# Altium PCB dipext-sock_r2.PcbDoc
Units mil, origin at the board's own origin, x right, y up, seen from the top; angles counter-clockwise.
Board outline 3500 x 3500 mil, 2 copper layers (Top Layer, Bottom Layer); 46 components, 80 nets, 164 pads, 0 vias.
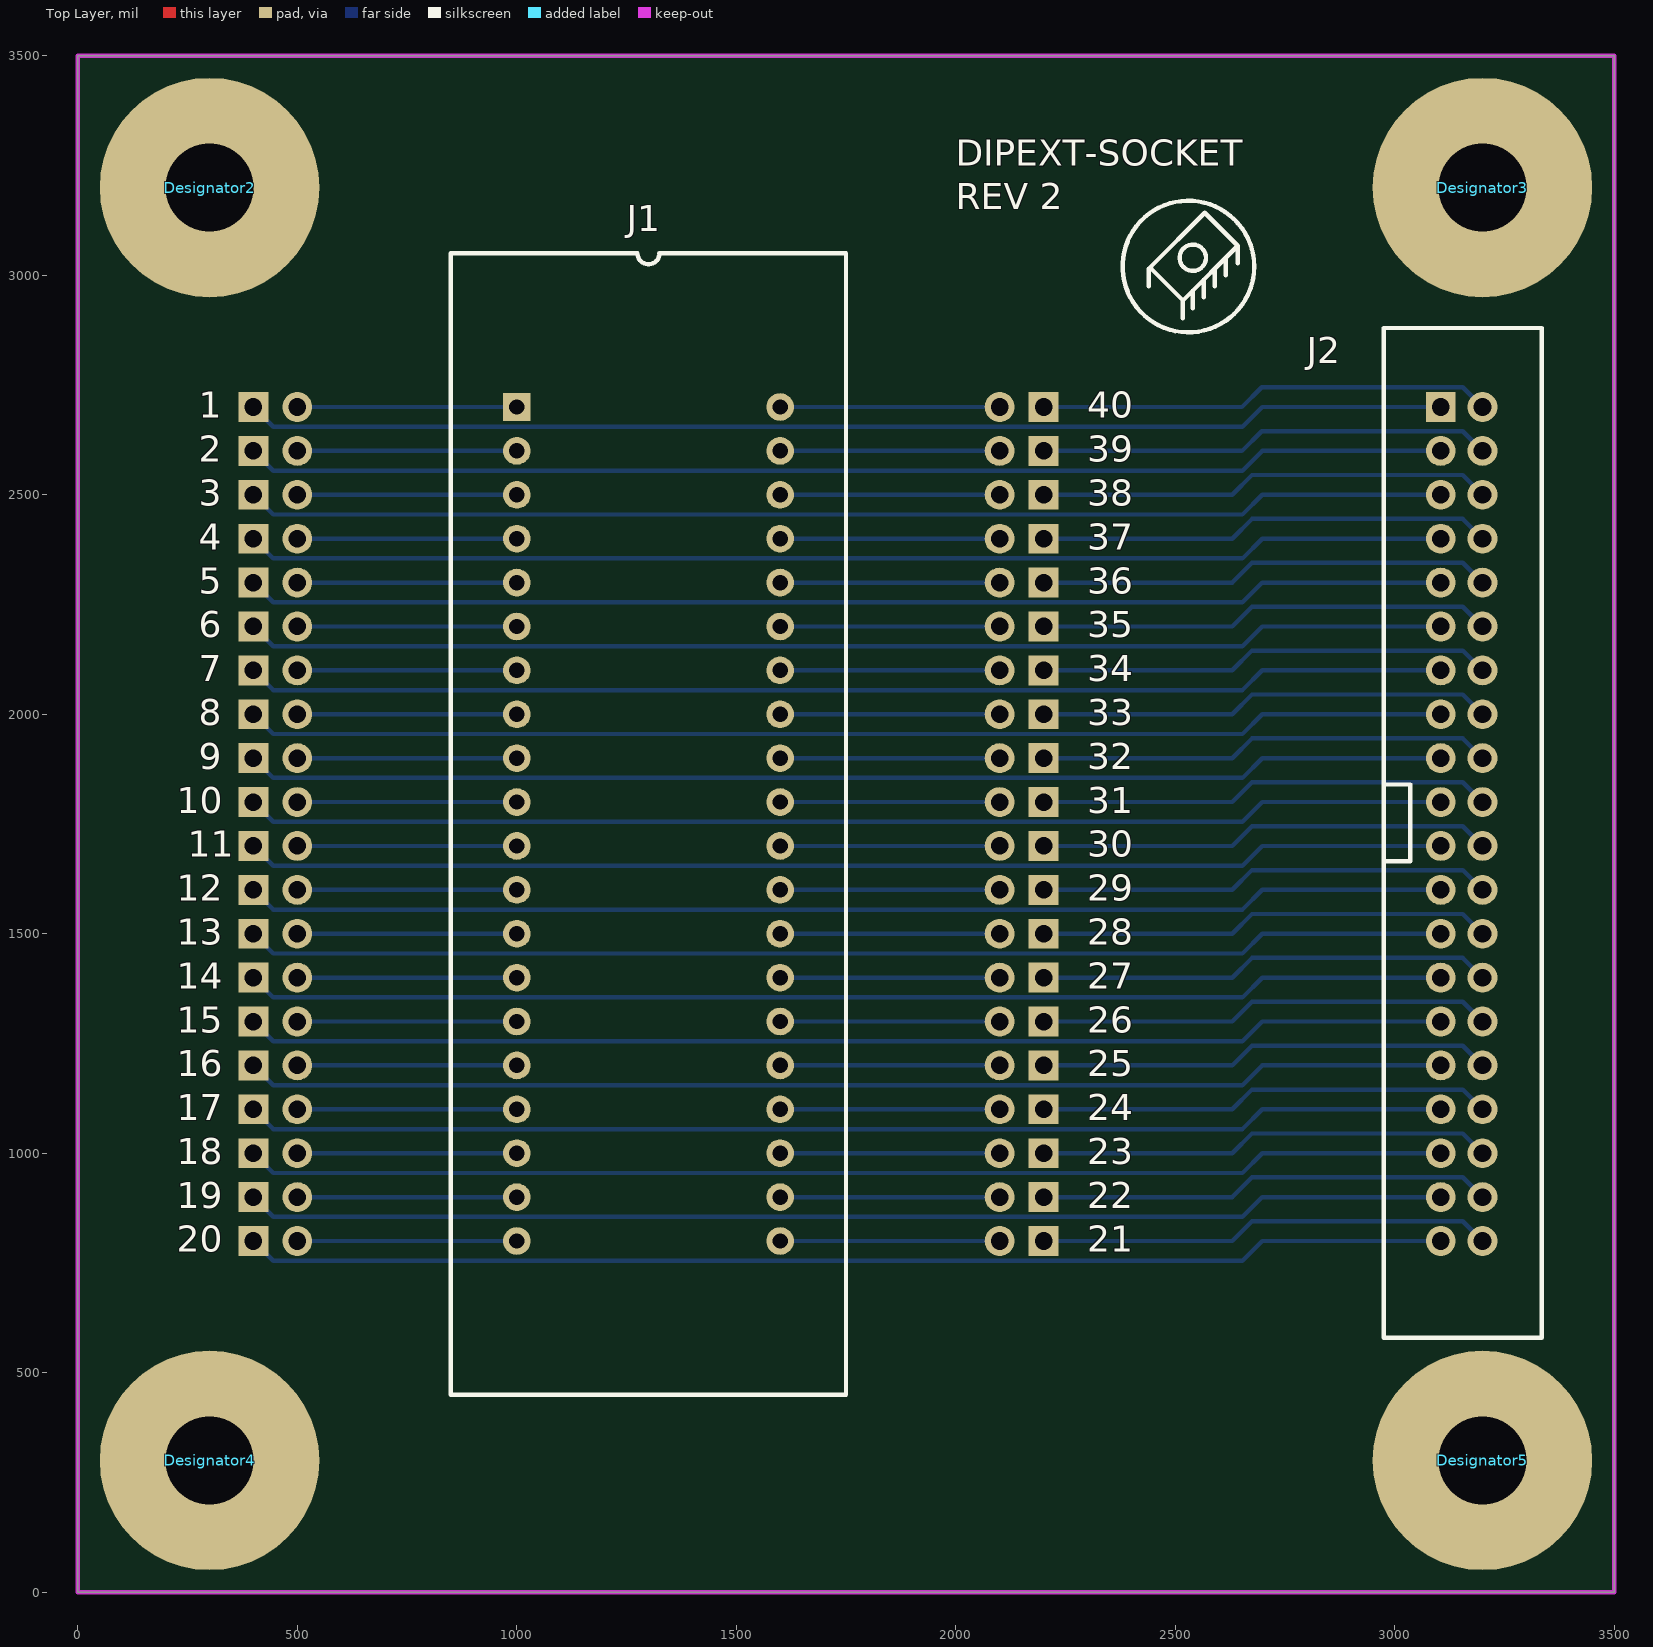
[diagram p0: Top Layer view]
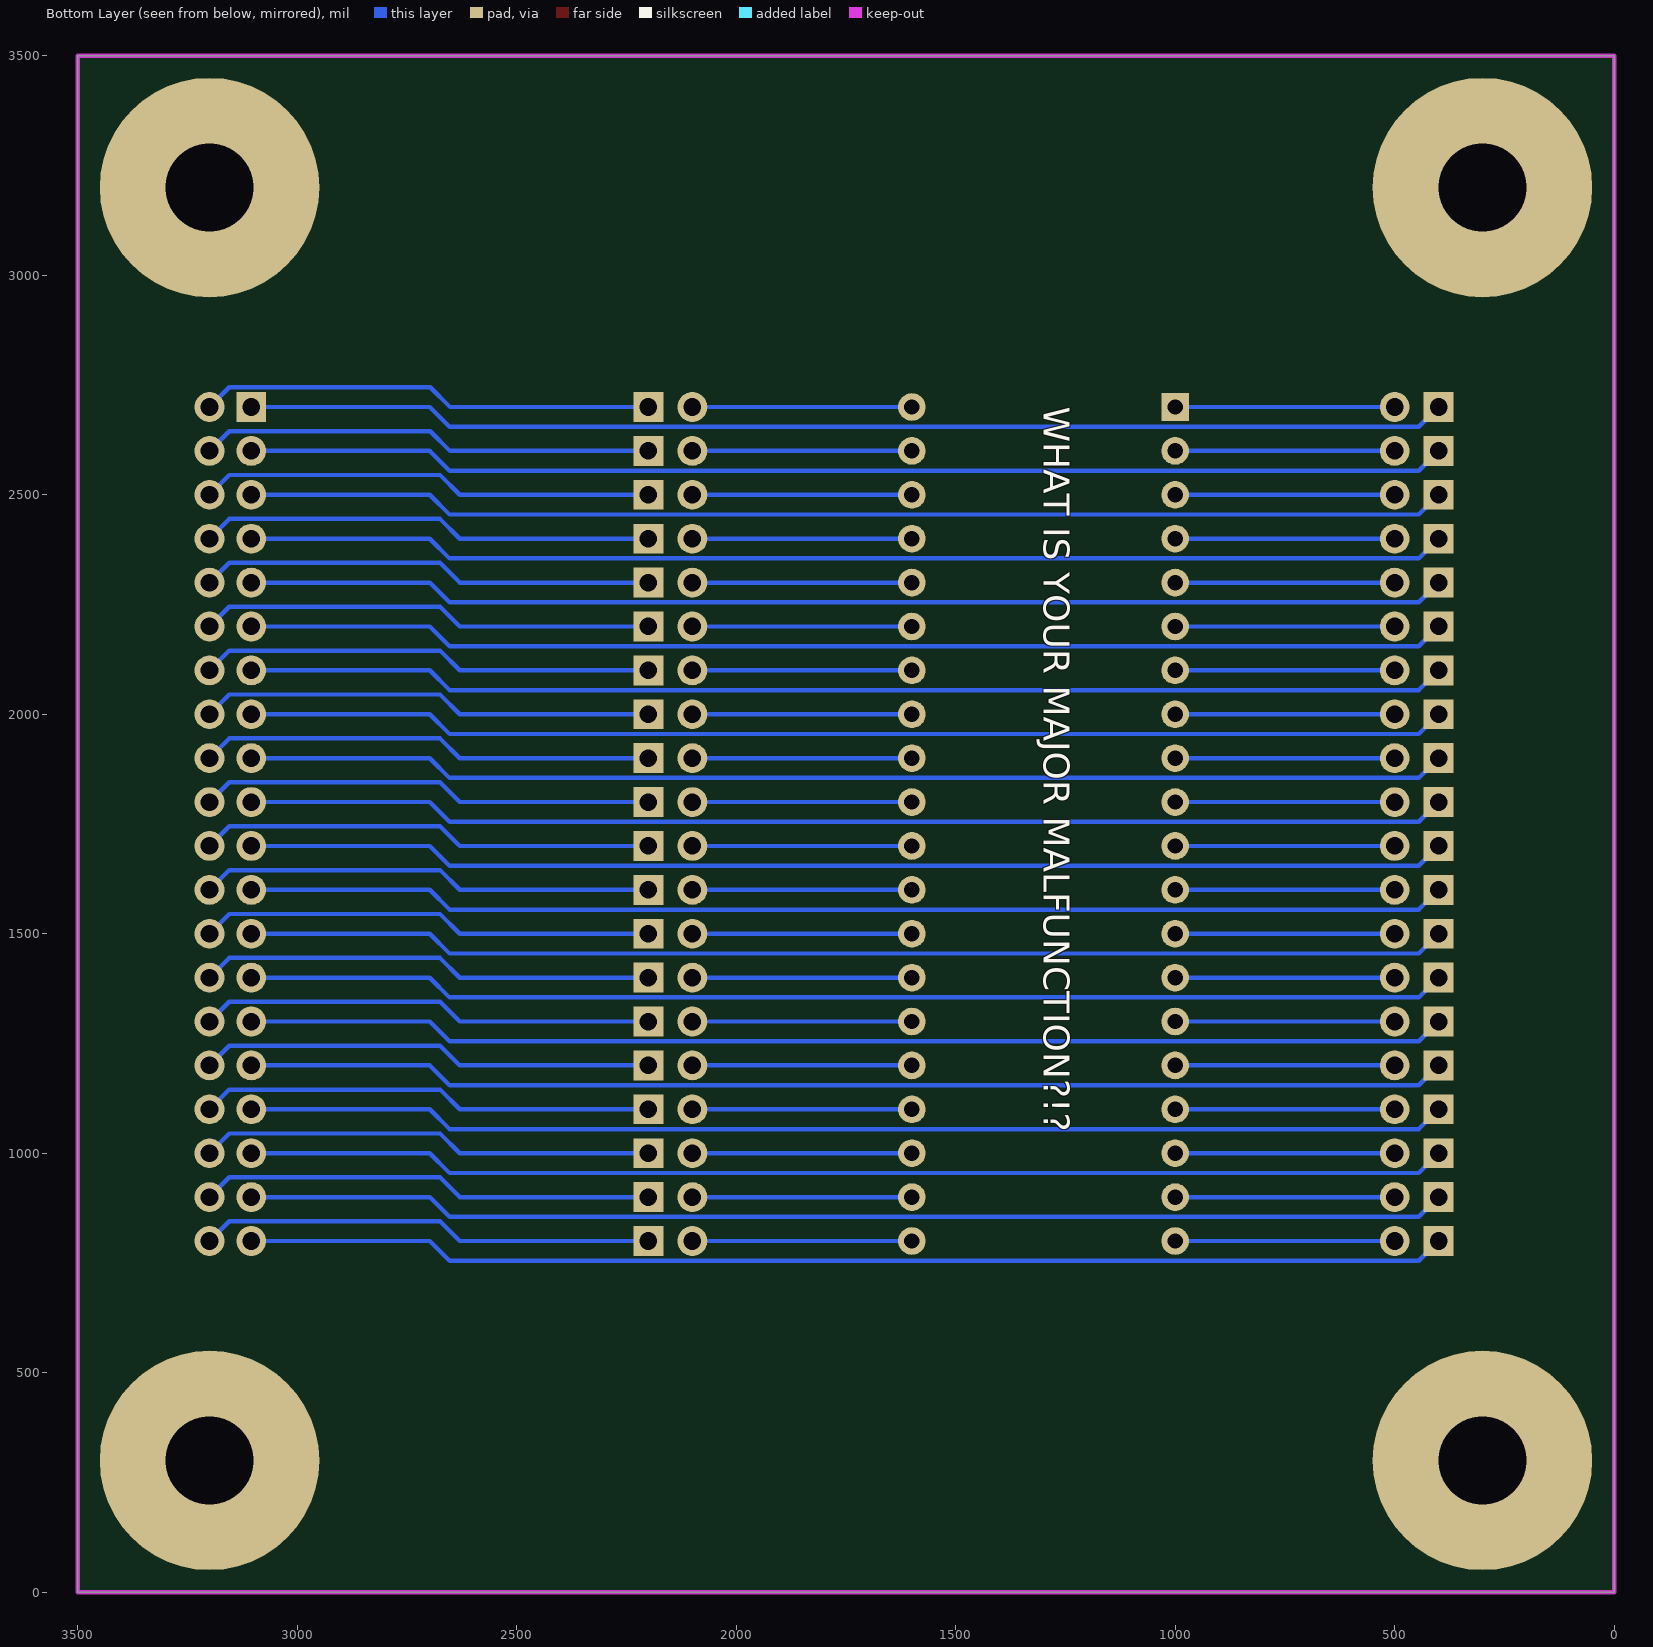
[diagram p1: Bottom Layer view, seen from below]

## Layer stack, top to bottom
Top Solder: solder mask 0.4, Solder Resist, Dk 3.5
Top Layer: signal copper 1.4
Dielectric 1: dielectric 12.6, FR-4, Dk 4.8
Bottom Layer: signal copper 1.4
Bottom Solder: solder mask 0.4, Solder Resist, Dk 3.5

## Board outline
0,0 3500,0 3500,3500 0,3500

## Design rules (kind name [scope] priority, off if disabled: settings)
Clearance [All] p1: gap=10
PolygonConnect [All] p1: connectstyle=Relief reliefconductorwidth=10 reliefentries=4 polygonreliefangle="90 Angle" airgapwidth=10
RoutingVias [All] p1: holewidth=28 width=50 viastyle="Through Hole" minholewidth=28 minwidth=50 maxholewidth=28 maxwidth=50
SolderMaskExpansion [All] p1: expansion=4
Width [All] p1: maxlimit=10 minlimit=10 preferedwidth=10
30 further rules are at their usual default settings.

## Classes and differential pairs
component class top: J1 J2
component class CH1: J3_CH1
component class CH2: J3_CH2
component class CH3: J3_CH3
component class CH4: J3_CH4
component class CH5: J3_CH5
component class CH6: J3_CH6
component class CH7: J3_CH7
component class CH8: J3_CH8
component class CH9: J3_CH9
component class CH10: J3_CH10
component class CH11: J3_CH11
component class CH12: J3_CH12
component class CH13: J3_CH13
component class CH14: J3_CH14
component class CH15: J3_CH15
component class CH16: J3_CH16
component class CH17: J3_CH17
component class CH18: J3_CH18
component class CH19: J3_CH19
component class CH20: J3_CH20
component class CH21: J3_CH21
component class CH22: J3_CH22
component class CH23: J3_CH23
component class CH24: J3_CH24
component class CH25: J3_CH25
component class CH26: J3_CH26
component class CH27: J3_CH27
component class CH28: J3_CH28
component class CH29: J3_CH29
component class CH30: J3_CH30
component class CH31: J3_CH31
component class CH32: J3_CH32
component class CH33: J3_CH33
component class CH34: J3_CH34
component class CH35: J3_CH35
component class CH36: J3_CH36
component class CH37: J3_CH37
component class CH38: J3_CH38
component class CH39: J3_CH39
component class CH40: J3_CH40
net class I[1..40]: I1 I2 I3 I4 I5 I6 I7 I8 I9 I10 I11 I12 I13 I14 I15 I16 I17 I18 I19 I20 I21 I22 I23 I24 I25 I26 I27 I28 I29 I30 I31 I32 I33 I34 I35 I36 I37 I38 I39 I40
net class S[1..40]: S1 S2 S3 S4 S5 S6 S7 S8 S9 S10 S11 S12 S13 S14 S15 S16 S17 S18 S19 S20 S21 S22 S23 S24 S25 S26 S27 S28 S29 S30 S31 S32 S33 S34 S35 S36 S37 S38 S39 S40
channel class chan: CH1 CH2 CH3 CH4 CH5 CH6 CH7 CH8 CH9 CH10 CH11 CH12 CH13 CH14 CH15 CH16 CH17 CH18 CH19 CH20 CH21 CH22 CH23 CH24 CH25 CH26 CH27 CH28 CH29 CH30 CH31 CH32 CH33 CH34 CH35 CH36 CH37 CH38 CH39 CH40

## Components (designator, comment, footprint, x,y, rotation, side; value= is the part's Value field where it differs from the comment)
1 "XG4H-5031" SIL2 400,2700 r90 top (schematic designator J3)
2 "XG4H-5031" SIL2 400,2600 r90 top (schematic designator J3)
3 "XG4H-5031" SIL2 400,2500 r90 top (schematic designator J3)
4 "XG4H-5031" SIL2 400,2400 r90 top (schematic designator J3)
5 "XG4H-5031" SIL2 400,2300 r90 top (schematic designator J3)
6 "XG4H-5031" SIL2 400,2200 r90 top (schematic designator J3)
7 "XG4H-5031" SIL2 400,2100 r90 top (schematic designator J3)
8 "XG4H-5031" SIL2 400,2000 r90 top (schematic designator J3)
9 "XG4H-5031" SIL2 400,1900 r90 top (schematic designator J3)
10 "XG4H-5031" SIL2 400,1800 r90 top (schematic designator J3)
11 "XG4H-5031" SIL2 400,1700 r90 top (schematic designator J3)
12 "XG4H-5031" SIL2 400,1600 r90 top (schematic designator J3)
13 "XG4H-5031" SIL2 400,1500 r90 top (schematic designator J3)
14 "XG4H-5031" SIL2 400,1400 r90 top (schematic designator J3)
15 "XG4H-5031" SIL2 400,1300 r90 top (schematic designator J3)
16 "XG4H-5031" SIL2 400,1200 r90 top (schematic designator J3)
17 "XG4H-5031" SIL2 400,1100 r90 top (schematic designator J3)
18 "XG4H-5031" SIL2 400,1000 r90 top (schematic designator J3)
19 "XG4H-5031" SIL2 400,900 r90 top (schematic designator J3)
20 "XG4H-5031" SIL2 400,800 r90 top (schematic designator J3)
21 "XG4H-5031" SIL2 2200,800 r270 top (schematic designator J3)
22 "XG4H-5031" SIL2 2200,900 r270 top (schematic designator J3)
23 "XG4H-5031" SIL2 2200,1000 r270 top (schematic designator J3)
24 "XG4H-5031" SIL2 2200,1100 r270 top (schematic designator J3)
25 "XG4H-5031" SIL2 2200,1200 r270 top (schematic designator J3)
26 "XG4H-5031" SIL2 2200,1300 r270 top (schematic designator J3)
27 "XG4H-5031" SIL2 2200,1400 r270 top (schematic designator J3)
28 "XG4H-5031" SIL2 2200,1500 r270 top (schematic designator J3)
29 "XG4H-5031" SIL2 2200,1600 r270 top (schematic designator J3)
30 "XG4H-5031" SIL2 2200,1700 r270 top (schematic designator J3)
31 "XG4H-5031" SIL2 2200,1800 r270 top (schematic designator J3)
32 "XG4H-5031" SIL2 2200,1900 r270 top (schematic designator J3)
33 "XG4H-5031" SIL2 2200,2000 r270 top (schematic designator J3)
34 "XG4H-5031" SIL2 2200,2100 r270 top (schematic designator J3)
35 "XG4H-5031" SIL2 2200,2200 r270 top (schematic designator J3)
36 "XG4H-5031" SIL2 2200,2300 r270 top (schematic designator J3)
37 "XG4H-5031" SIL2 2200,2400 r270 top (schematic designator J3)
38 "XG4H-5031" SIL2 2200,2500 r270 top (schematic designator J3)
39 "XG4H-5031" SIL2 2200,2600 r270 top (schematic designator J3)
40 "XG4H-5031" SIL2 2200,2700 r270 top (schematic designator J3)
Designator2 "Comment" SAE10_LOOSE 300,3200 r0 top
Designator3 "Comment" SAE10_LOOSE 3200,3200 r0 top
Designator4 "Comment" SAE10_LOOSE 300,300 r0 top
Designator5 "Comment" SAE10_LOOSE 3200,300 r0 top
J1 "240-1288-00-0602J" 240-1300-00-0602J 1000,2700 r0 top
J2 "IDC40" IDC40 2975,2880 r0 top

## Footprints (in the part's own frame and the unit in brackets; to place one, negate y for a bottom-side part, rotate by r counter-clockwise, add the part's x,y. Pads: shape width x height; smd on the part's side, far side on the other; paste and mask are expansions set on the pad)
240-1300-00-0602J [mil]
  rect 63x63 hole 35: 1(0,0)
  round 63 hole 35: 2(0,-100) 3(0,-200) 4(0,-300) 5(0,-400) 6(0,-500) 7(0,-600) 8(0,-700) 9(0,-800) 10(0,-900) 11(0,-1000) 12(0,-1100) 13(0,-1200) 14(0,-1300) 15(0,-1400) 16(0,-1500) 17(0,-1600) 18(0,-1700) 19(0,-1800) 20(0,-1900) 21(600,-1900) 22(600,-1800) 23(600,-1700) 24(600,-1600) 25(600,-1500) 26(600,-1400) 27(600,-1300) 28(600,-1200) 29(600,-1100) 30(600,-1000) 31(600,-900) 32(600,-800) 33(600,-700) 34(600,-600) 35(600,-500) 36(600,-400) 37(600,-300) 38(600,-200) 39(600,-100) 40(600,0)
  silkscreen extent -150,-2250 750,350
IDC40 [mil]
  rect 68x68 hole 40: 1(130,-180)
  round 68 hole 40: 2(225,-180) 3(130,-280) 4(225,-280) 5(130,-380) 6(225,-380) 7(130,-480) 8(225,-480) 9(130,-580) 10(225,-580) 11(130,-680) 12(225,-680) 13(130,-780) 14(225,-780) 15(130,-880) 16(225,-880) 17(130,-980) 18(225,-980) 19(130,-1080) 20(225,-1080) 21(130,-1180) 22(225,-1180) 23(130,-1280) 24(225,-1280) 25(130,-1380) 26(225,-1380) 27(130,-1480) 28(225,-1480) 29(130,-1580) 30(225,-1580) 31(130,-1680) 32(225,-1680) 33(130,-1780) 34(225,-1780) 35(130,-1880) 36(225,-1880) 37(130,-1980) 38(225,-1980) 39(130,-2080) 40(225,-2080)
  silkscreen extent 0,-2300 360,0
SAE10_LOOSE [mil]
  round 500 hole 201: 1(0,0)
SIL2 [mil]
  rect 68x68 hole 40: 1(0,0)
  round 68 hole 40: 2(0,-100)

## Part data
1 2 3 4 5 6 7 8 9 10 11 12 13 14 15 16 17 18 19 20 21 22 23 24 25 26 27 28 29 30 31 32 33 34 35 36 37 38 39 40: "Fencepost 2x1 0.1\""
J1: "DIP40 ZIF"

## Nets (pads, with @x,y where several pads share a name; then routed paths per layer and width w, separated by ;. In a path a pad name is that pad's centre, name@x,y a point inside that pad or via, vN(x,y) a via of type N, cw(c..) or ccw(c..) an arc to the next point about the centre after c; other vN are vias at no path point)
I1: 1.1 J2.1 | length 2742.3
  Bottom Layer w10: 1.1 445,2655 2653,2655 2698,2700 J2.1
I2: 2.1 J2.3 | length 2742.3
  Bottom Layer w10: 2.1 445,2555 2653,2555 2698,2600 J2.3
I3: 3.1 J2.5 | length 2742.3
  Bottom Layer w10: 3.1 445,2455 2653,2455 2698,2500 J2.5
I4: 4.1 J2.7 | length 2742.3
  Bottom Layer w10: 4.1 445,2355 2653,2355 2698,2400 J2.7
I5: 5.1 J2.9 | length 2742.3
  Bottom Layer w10: 5.1 445,2255 2653,2255 2698,2300 J2.9
I6: 6.1 J2.11 | length 2742.3
  Bottom Layer w10: 6.1 445,2155 2653,2155 2698,2200 J2.11
I7: 7.1 J2.13 | length 2742.3
  Bottom Layer w10: 7.1 445,2055 2653,2055 2698,2100 J2.13
I8: 8.1 J2.15 | length 2742.3
  Bottom Layer w10: 8.1 445,1955 2653,1955 2698,2000 J2.15
I9: 9.1 J2.17 | length 2742.3
  Bottom Layer w10: 9.1 445,1855 2653,1855 2698,1900 J2.17
I10: 10.1 J2.19 | length 2742.3
  Bottom Layer w10: 10.1 445,1755 2653,1755 2698,1800 J2.19
I11: 11.1 J2.21 | length 2742.3
  Bottom Layer w10: 11.1 445,1655 2653,1655 2698,1700 J2.21
I12: 12.1 J2.23 | length 2742.3
  Bottom Layer w10: 12.1 445,1555 2653,1555 2698,1600 J2.23
I13: 13.1 J2.25 | length 2742.3
  Bottom Layer w10: 13.1 445,1455 2653,1455 2698,1500 J2.25
I14: 14.1 J2.27 | length 2742.3
  Bottom Layer w10: 14.1 445,1355 2653,1355 2698,1400 J2.27
I15: 15.1 J2.29 | length 2742.3
  Bottom Layer w10: 15.1 445,1255 2653,1255 2698,1300 J2.29
I16: 16.1 J2.31 | length 2742.3
  Bottom Layer w10: 16.1 445,1155 2653,1155 2698,1200 J2.31
I17: 17.1 J2.33 | length 2742.3
  Bottom Layer w10: 17.1 445,1055 2653,1055 2698,1100 J2.33
I18: 18.1 J2.35 | length 2742.3
  Bottom Layer w10: 18.1 445,955 2653,955 2698,1000 J2.35
I19: 19.1 J2.37 | length 2742.3
  Bottom Layer w10: 19.1 445,855 2653,855 2698,900 J2.37
I20: 20.1 J2.39 | length 2742.3
  Bottom Layer w10: 20.1 445,755 2653,755 2698,800 J2.39
I21: 21.1 J2.40 | length 1037.3
  Bottom Layer w10: 21.1 2630,800 2675,845 3155,845 J2.40
I22: 22.1 J2.38 | length 1037.3
  Bottom Layer w10: 22.1 2630,900 2675,945 3155,945 J2.38
I23: 23.1 J2.36 | length 1037.3
  Bottom Layer w10: 23.1 2630,1000 2675,1045 3155,1045 J2.36
I24: 24.1 J2.34 | length 1037.3
  Bottom Layer w10: 24.1 2630,1100 2675,1145 3155,1145 J2.34
I25: 25.1 J2.32 | length 1037.3
  Bottom Layer w10: 25.1 2630,1200 2675,1245 3155,1245 J2.32
I26: 26.1 J2.30 | length 1037.3
  Bottom Layer w10: 26.1 2630,1300 2675,1345 3155,1345 J2.30
I27: 27.1 J2.28 | length 1037.3
  Bottom Layer w10: 27.1 2630,1400 2675,1445 3155,1445 J2.28
I28: 28.1 J2.26 | length 1037.3
  Bottom Layer w10: 28.1 2630,1500 2675,1545 3155,1545 J2.26
I29: 29.1 J2.24 | length 1037.3
  Bottom Layer w10: 29.1 2630,1600 2675,1645 3155,1645 J2.24
I30: 30.1 J2.22 | length 1037.3
  Bottom Layer w10: 30.1 2630,1700 2675,1745 3155,1745 J2.22
I31: 31.1 J2.20 | length 1037.3
  Bottom Layer w10: 31.1 2630,1800 2675,1845 3155,1845 J2.20
I32: 32.1 J2.18 | length 1037.3
  Bottom Layer w10: 32.1 2630,1900 2675,1945 3155,1945 J2.18
I33: 33.1 J2.16 | length 1037.3
  Bottom Layer w10: 33.1 2630,2000 2675,2045 3155,2045 J2.16
I34: 34.1 J2.14 | length 1037.3
  Bottom Layer w10: 34.1 2630,2100 2675,2145 3155,2145 J2.14
I35: 35.1 J2.12 | length 1037.3
  Bottom Layer w10: 35.1 2630,2200 2675,2245 3155,2245 J2.12
I36: 36.1 J2.10 | length 1037.3
  Bottom Layer w10: 36.1 2630,2300 2675,2345 3155,2345 J2.10
I37: 37.1 J2.8 | length 1037.3
  Bottom Layer w10: 37.1 2630,2400 2675,2445 3155,2445 J2.8
I38: 38.1 J2.6 | length 1037.3
  Bottom Layer w10: 38.1 2630,2500 2675,2545 3155,2545 J2.6
I39: 39.1 J2.4 | length 1037.3
  Bottom Layer w10: 39.1 2652,2600 2697,2645 3155,2645 J2.4
I40: 40.1 J2.2 | length 1037.3
  Bottom Layer w10: 40.1 2652,2700 2697,2745 3155,2745 J2.2
S1: 1.2 J1.1 | length 500
  Bottom Layer w10: 1.2 J1.1
S2: 2.2 J1.2 | length 500
  Bottom Layer w10: 2.2 J1.2
S3: 3.2 J1.3 | length 500
  Bottom Layer w10: 3.2 J1.3
S4: 4.2 J1.4 | length 500
  Bottom Layer w10: 4.2 J1.4
S5: 5.2 J1.5 | length 500
  Bottom Layer w10: 5.2 J1.5
S6: 6.2 J1.6 | length 500
  Bottom Layer w10: 6.2 J1.6
S7: 7.2 J1.7 | length 500
  Bottom Layer w10: 7.2 J1.7
S8: 8.2 J1.8 | length 500
  Bottom Layer w10: 8.2 J1.8
S9: 9.2 J1.9 | length 500
  Bottom Layer w10: 9.2 J1.9
S10: 10.2 J1.10 | length 500
  Bottom Layer w10: 10.2 J1.10
S11: 11.2 J1.11 | length 500
  Bottom Layer w10: 11.2 J1.11
S12: 12.2 J1.12 | length 500
  Bottom Layer w10: 12.2 J1.12
S13: 13.2 J1.13 | length 500
  Bottom Layer w10: 13.2 J1.13
S14: 14.2 J1.14 | length 500
  Bottom Layer w10: 14.2 J1.14
S15: 15.2 J1.15 | length 500
  Bottom Layer w10: 15.2 J1.15
S16: 16.2 J1.16 | length 500
  Bottom Layer w10: 16.2 J1.16
S17: 17.2 J1.17 | length 500
  Bottom Layer w10: 17.2 J1.17
S18: 18.2 J1.18 | length 500
  Bottom Layer w10: 18.2 J1.18
S19: 19.2 J1.19 | length 500
  Bottom Layer w10: 19.2 J1.19
S20: 20.2 J1.20 | length 500
  Bottom Layer w10: 20.2 J1.20
S21: 21.2 J1.21 | length 500
  Bottom Layer w10: J1.21 21.2
S22: 22.2 J1.22 | length 500
  Bottom Layer w10: J1.22 22.2
S23: 23.2 J1.23 | length 500
  Bottom Layer w10: J1.23 23.2
S24: 24.2 J1.24 | length 500
  Bottom Layer w10: J1.24 24.2
S25: 25.2 J1.25 | length 500
  Bottom Layer w10: J1.25 25.2
S26: 26.2 J1.26 | length 500
  Bottom Layer w10: J1.26 26.2
S27: 27.2 J1.27 | length 500
  Bottom Layer w10: J1.27 27.2
S28: 28.2 J1.28 | length 500
  Bottom Layer w10: J1.28 28.2
S29: 29.2 J1.29 | length 500
  Bottom Layer w10: J1.29 29.2
S30: 30.2 J1.30 | length 500
  Bottom Layer w10: J1.30 30.2
S31: 31.2 J1.31 | length 500
  Bottom Layer w10: J1.31 31.2
S32: 32.2 J1.32 | length 500
  Bottom Layer w10: J1.32 32.2
S33: 33.2 J1.33 | length 500
  Bottom Layer w10: J1.33 33.2
S34: 34.2 J1.34 | length 500
  Bottom Layer w10: J1.34 34.2
S35: 35.2 J1.35 | length 500
  Bottom Layer w10: J1.35 35.2
S36: 36.2 J1.36 | length 500
  Bottom Layer w10: J1.36 36.2
S37: 37.2 J1.37 | length 500
  Bottom Layer w10: J1.37 37.2
S38: 38.2 J1.38 | length 500
  Bottom Layer w10: J1.38 38.2
S39: 39.2 J1.39 | length 500
  Bottom Layer w10: J1.39 39.2
S40: 40.2 J1.40 | length 500
  Bottom Layer w10: J1.40 40.2
pads on no net: Designator2.1 Designator3.1 Designator4.1 Designator5.1

## Keep-outs
Keep-Out Layer:
  the board outline again, w10

## Silkscreen, mask and mechanical layers (free items; w line width, h text height)
Top Overlay:
  circle w10: c2540,3040 r30
  circle w10: c2530,3020 r150
  lines w10: 2440,2975 2440,3015 ; 2445,3020 2442.5,3017.5 ; 2517.5,2902.5 2517.5,2942.5 ; 2540,2925 2540,2965 ; 2565,2950 2565,2990 ; 2590,2975 2590,3015 ; 2615,3000 2615,3040 ; 2642.5,3027.5 2642.5,3067.5 ; 2442.5,3017.5 2517.5,2942.5 ; 2442.5,3017.5 2567.5,3142.5 2642.5,3067.5 ; 2517.5,2942.5 2642.5,3067.5
  text "DIPEXT-SOCKET" at 2000,3250 h60
  text "REV 2" at 2000,3150 h60
Bottom Overlay:
  text "WHAT IS YOUR MAJOR MALFUNCTION?!?" at 1300,2700 h60 r90